# EAGLE board tinkercad (EAGLE 7.6.0)

Size 73.58 x 63.39 mm. Coordinates in mm from the lower left corner, seen from the top.
Outline: 0,0 56.82,0 56.82,53.33 0,53.33 0,0
Copper layers (1*16): Top 0.035mm / dielectric 1.5mm / Bottom 0.035mm
Design rules "default": minimum track width 10mil, minimum drill 24mil, track to track 8mil, track to pad 8mil, pad to pad 8mil, via to via 8mil, smd to smd 8mil, copper to edge 40mil, drill to drill 8mil, minimum pad ring 10mil, minimum via ring 8mil, stop-mask expansion 4mil, vias tented up to drill 0mil, thermal gap 10mil

## Footprints (pad centres in the part's own frame; a part is rotated, then mirrored left to right if it is on the bottom)
LED5MM = drill 0.813 octagon: A -1.27,0; K 1.27,0
B25V = drill 0.813 long: A 2.54,0.635; E -2.54,0.635; S 0,0.635
0207/10 = drill 0.813 octagon: 1 -5.08,0; 2 5.08,0
TL1105 = drill 1 pad 1.676: 1 -2.25,3.25; 2 2.25,3.25; 3 -2.25,-3.25; 4 2.25,-3.25
ARDUINO_UNO = drill 1.016 pad 1.88: 0 63.5,50.8; 1 60.96,50.8; 2 58.42,50.8; 3 55.88,50.8; 3.3V 35.56,2.54; 4 53.34,50.8; 5 50.8,50.8; 5V 38.1,2.54; 6 48.26,50.8; 7 45.72,50.8; 8 41.656,50.8; 9 39.116,50.8; 10 36.576,50.8; 11 34.036,50.8; 12 31.496,50.8; 13 28.956,50.8; A0 50.8,2.54; A1 53.34,2.54; A2 55.88,2.54; A3 58.42,2.54; A4 60.96,2.54; A5 63.5,2.54; AREF 23.876,50.8; GND 26.416,50.8; GND. 43.18,2.54; GND.. 40.64,2.54; I/OREF 30.48,2.54; N/C 27.94,2.54; RESET 33.02,2.54; SCL 18.796,50.8; SDA 21.336,50.8; VIN 45.72,2.54 | hole 3.2: 66.04,7.62; 66.04,35.56; 15.24,50.8; 13.97,2.54

## Placement (x,y rotation side)
Dled1  [LED5MM]  5,22.78 0 top
Dled2  [LED5MM]  5,35.48 0 top
Dled3  [LED5MM]  5,48.18 0 top
Dstarter  [LED5MM]  5,60.88 0 top
Rpotpot  250k‎Ω  [B25V]  5,187.88 0 top  (outside the outline)
Rres1  220‎Ω  [0207/10]  5,73.58 0 top  (outside the outline)
Rres2  220‎Ω  [0207/10]  5,86.28 0 top  (outside the outline)
Rres3  220‎Ω  [0207/10]  5,98.98 0 top  (outside the outline)
RresA  10k‎Ω  [0207/10]  5,149.78 0 top  (outside the outline)
RresB  10k‎Ω  [0207/10]  5,162.48 0 top  (outside the outline)
RresStart  220‎Ω  [0207/10]  5,111.68 0 top  (outside the outline)
RstartRes  10k‎Ω  [0207/10]  5,200.58 0 top  (outside the outline)
SbuttonA  [TL1105]  5,137.08 0 top  (outside the outline)
SbuttonB  [TL1105]  5,124.38 0 top  (outside the outline)
SstartButton  [TL1105]  5,175.18 0 top  (outside the outline)
U1  [ARDUINO_UNO]  5,10.08 0 top

## Library data of the parts
Dled1-Dled3 Dstarter Rpotpot Rres1-Rres3 RresA RresB RresStart RstartRes SbuttonA SbuttonB SstartButton U1 = AUTODESK_CIRCUITS_BREADBOARD

## Nets
N$1: Dled3.A Rres3.2
N$2: Rres3.1 U1.10
N$3: Dled2.A Rres2.2
N$4: Rres2.1 U1.11
N$5: Dled1.A Rres1.2
N$6: Rres1.1 U1.12
N$7: RresB.2 SbuttonB.1 SbuttonB.3 U1.2
N$8: RresStart.1 U1.13
N$9: RresA.2 SbuttonA.2 SbuttonA.4 U1.3
N$10: Rpotpot.E SbuttonA.1 SbuttonA.3 SbuttonB.2 SbuttonB.4 SstartButton.3 U1.5V
N$11: Rpotpot.S U1.A0
N$12: Dstarter.A RresStart.2
N$13: SstartButton.2 U1.4
N$14: Dled1.K Dled2.K Dled3.K Dstarter.K Rpotpot.A RresA.1 RresB.1 RstartRes.1 U1.GND..
N$15: RstartRes.2 SstartButton.4

## Tracks (layer width: path | path; a pad name or v marks a point on that pad's centre or on a via)
N$1  (1 unrouted)
N$2  (1 unrouted)
N$3  (1 unrouted)
N$4  (1 unrouted)
N$5  (1 unrouted)
N$6  (1 unrouted)
N$7  (3 unrouted)
N$8  (1 unrouted)
N$9  (3 unrouted)
N$10  (6 unrouted)
N$11  (1 unrouted)
N$12  (1 unrouted)
N$13  (1 unrouted)
N$14  (8 unrouted)
N$15  (1 unrouted)